# Altium PCB PCB1.PcbDoc
Units mm, origin at the board's own origin, x right, y up, seen from the top; angles counter-clockwise.
Board outline 32 x 16 mm, 2 copper layers (Top Layer, Bottom Layer), stack 0.48 mm thick; 46 components, 36 nets, 160 pads, 7 vias.
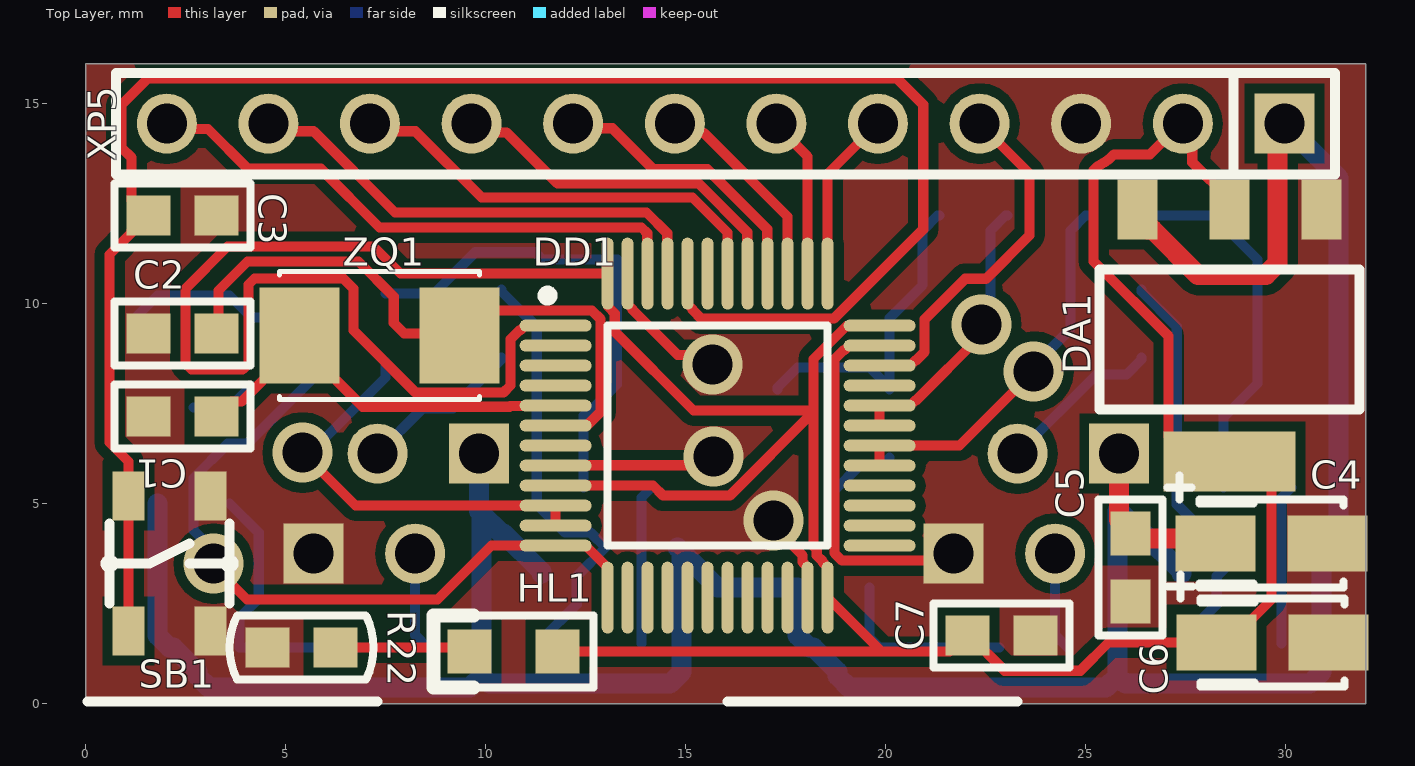
[diagram p0: Top Layer view]
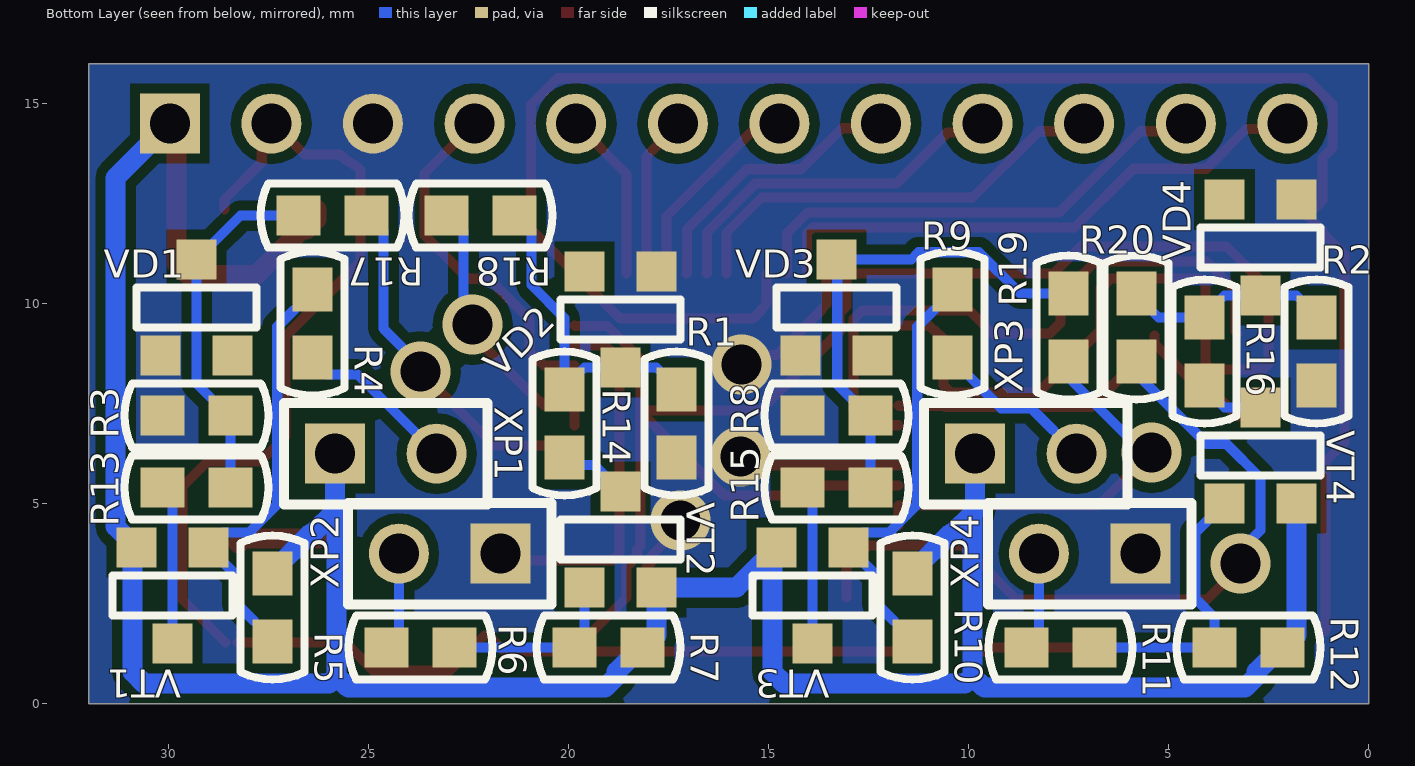
[diagram p1: Bottom Layer view, seen from below]
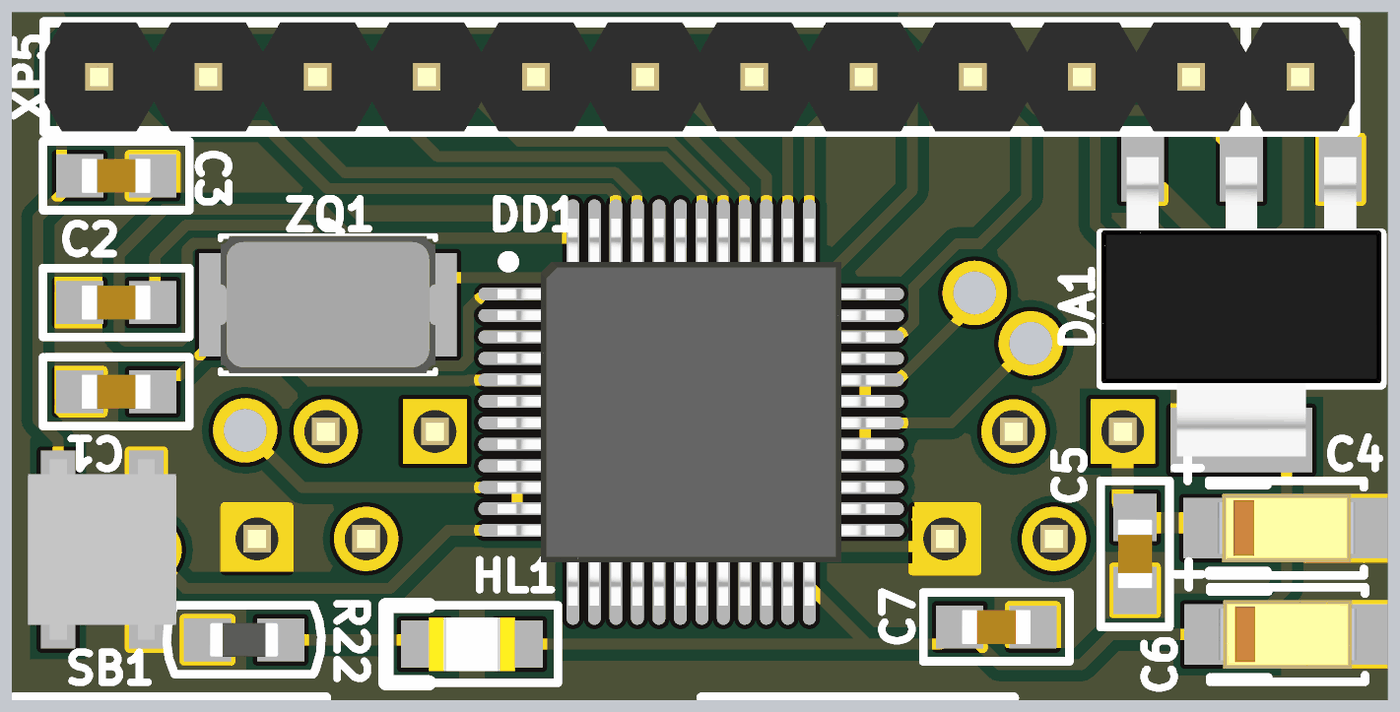
[diagram p2: 3D render of the assembled board from above, using the file's embedded part models]
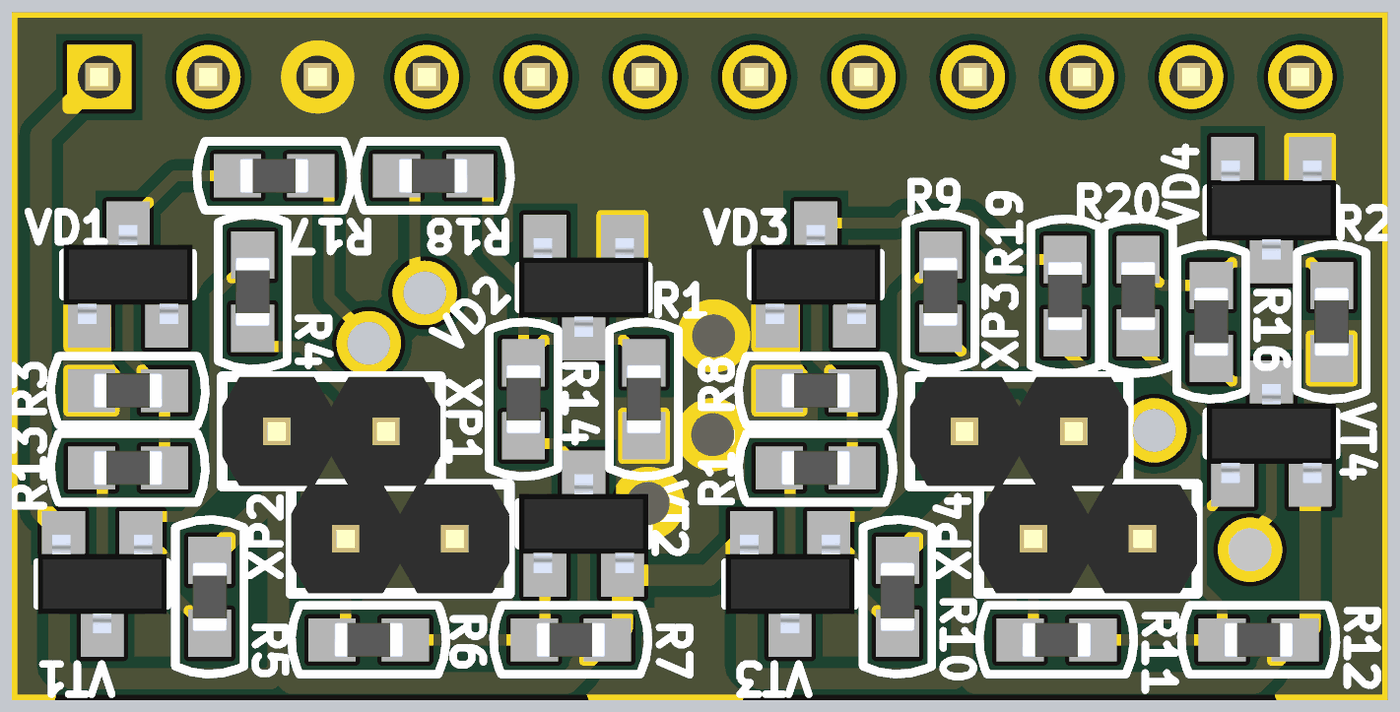
[diagram p3: 3D render of the assembled board from below, using the file's embedded part models]

## Layer stack, top to bottom
Top Solder: solder mask 0.0102, Solder Resist, Dk 3.5
Top Layer: signal copper 0.0356
Dielectric 1: dielectric 0.4086, FR-4, Dk 4.8
Bottom Layer: signal copper 0.0356
Bottom Solder: solder mask 0.0102, Solder Resist, Dk 3.5

## Board outline
0,0 32,0 32,16 0,16

## Design rules (kind name [scope] priority, off if disabled: settings)
Clearance [All] p1: gap=0.254 ignorepadtopadclearanceinfootprint=FALSE except(0: Arc-Hole Track-Hole SMDPad-Hole THPad-Hole Via-Hole Fill-Hole Poly-Hole Region-Hole Text-Hole; 0.1: Arc-Arc Arc-Track Arc-SMDPad Arc-Via Track-Track Track-SMDPad Track-Via SMDPad-SMDPad)
PolygonConnect [All] p1: connectstyle=Direct reliefconductorwidth=0.254 reliefentries=4 polygonreliefangle="90 Angle" airgapwidth=0.254
RoutingVias [All] p1: holewidth=0.711 width=1.27 viastyle="Through Hole" minholewidth=0.711 minwidth=1.27 maxholewidth=0.711 maxwidth=1.27
SolderMaskExpansion [All] p1: expansion=0.102 istentingtop=FALSE
UnRoutedNet [All] p1: checkbadconnections=TRUE
Width [All] p1: maxlimit=0.5 minlimit=0.1 preferedwidth=0.254
29 further rules are at their usual default settings.

## Components (designator, comment, footprint, x,y, rotation, side; value= is the part's Value field where it differs from the comment)
C1 "Capacitor" C0603 2.425,7.175 r0 top value=30pF
C2 "Capacitor" C0603 2.425,9.25 r0 top value=30pF
C3 "Capacitor" C0603 2.425,12.2 r0 top value=0.1uF
C4 "Capacitor-T" C3216-p 29.65,4 r0 top value=10uF
C5 "Capacitor" C0603 26.125,3.4 r270 top value=0.1uF
C6 "Capacitor-T" C3216-p 29.675,1.525 r0 top value=10uF
C7 "Capacitor" C0603 22.9,1.7 r0 top value=0.1uF
DA1 "LM1117-Series" SOT-223 28.6,9.1 r180 top value=LM1117MPX-ADJ
DD1 "STM32F103Cxxx-Series" LQFP-48 15.8,6.7 r0 top locked value=STM32F103C8T6
HL1 "Text" LD0805 10.7,1.3 r180 top value=KP-2012SGC
R1 "Resistor" R0603 17.3,7 r90 bottom value=10k
R2 "Resistor" R0603 1.3,8.8 r90 bottom value=10k
R3 "Resistor" R0603 29.3,7.2 r180 bottom value=10k
R4 "Resistor" R0603 26.4,9.5 r90 bottom value=10k
R5 "Resistor" R0603 27.4,2.4 r270 bottom value=100k
R6 "Resistor" R0603 23.7,1.4 r180 bottom value=10k
R7 "Resistor" R0603 19,1.4 r0 bottom value=10k
R8 "Resistor" R0603 13.3,7.2 r180 bottom value=10k
R9 "Resistor" R0603 10.4,9.5 r90 bottom value=10k
R10 "Resistor" R0603 11.4,2.4 r270 bottom value=100k
R11 "Resistor" R0603 7.7,1.4 r180 bottom value=10k
R12 "Resistor" R0603 3,1.4 r0 bottom value=10k
R13 "Resistor" R0603 29.3,5.4 r0 bottom value=1k
R14 "Resistor" R0603 20.1,7 r90 bottom value=1k
R15 "Resistor" R0603 13.3,5.4 r0 bottom value=1k
R16 "Resistor" R0603 4.1,8.8 r90 bottom value=1k
R17 "Resistor" R0603 25.9,12.2 r0 bottom value=1k
R18 "Resistor" R0603 22.2,12.2 r180 bottom value=1k
R19 "Resistor" R0603 7.5,9.4 r90 bottom value=1k
R20 "Resistor" R0603 5.8,9.4 r90 bottom value=1k
R22 "Resistor" R0603 5.4,1.4 r0 top value=200k
SB1 "Text" L-KLS7-TS3303A-1.5-250-B 2.1,3.5 r0 top
VD1 "Zener" SOT-23 29.3,9.9 r180 bottom value=BZX84-C3V3
VD2 "Zener" SOT-23 18.7,9.6 r0 bottom value=BZX84-C3V3
VD3 "Zener" SOT-23 13.3,9.9 r180 bottom value=BZX84-C3V3
VD4 "Zener" SOT-23 2.7,11.4 r0 bottom value=BZX84-C3V3
VT1 "BJT-PNP" SOT-23 29.9,2.7 r0 bottom value=BC857
VT2 "BJT-PNP" SOT-23 18.7,4.1 r180 bottom value=BC857
VT3 "BJT-PNP" SOT-23 13.9,2.7 r0 bottom value=BC857
VT4 "BJT-PNP" SOT-23 2.7,6.2 r180 bottom value=BC857
XP1 "in11" PLS-2 24.57,6.25 r180 bottom locked value=PLS-2
XP2 "in12" PLS-2 22.97,3.75 r0 bottom locked value=PLS-2
XP3 "in11" PLS-2 8.57,6.25 r180 bottom locked value=PLS-2
XP4 "in12" PLS-2 6.97,3.75 r0 bottom locked value=PLS-2
XP5 "Text" PLS-12 16,14.5 r180 top locked value=PLS-12
ZQ1 "NX5032GA-8.000M-STD-CSU-1" XTAL_NX5032GA-8.000M-STD-CSU-1 7.35,9.2 r180 top

## Footprints (in the part's own frame and the unit in brackets; to place one, negate y for a bottom-side part, rotate by r counter-clockwise, add the part's x,y. Pads: shape width x height; smd on the part's side, far side on the other; paste and mask are expansions set on the pad)
C0603 [mm] "1608M"
  rect 1.1x1 smd: 1(-0.85,0) 2(0.85,0)
  silkscreen extent -1.7,-0.8 1.7,0.8, body extent -0.8,-0.4 0.8,0.4, height 0.91
C3216-p [mm] "Type A"
  rect 2x1.4 smd: 1(-1.4,0) 2(1.4,0)
  silkscreen extent -2.6,-1.1 1.8,1.7, body extent -1.6,-0.8 1.6,0.8, height 1.8
L-KLS7-TS3303A-1.5-250-B [mm]
  rect 0.8x1.225 smd: 1(-1.025,-1.687) 1(-1.025,1.687) 2(1.025,-1.687) 2(1.025,1.687)
  silkscreen extent -1.6,-1 1.6,1, body extent -1.73,-2.1 1.72,2.1, height 1.5
LD0805 [mm]
  rect 1.1x1.1 smd: 1(-1.1,0) 2(1.1,0)
  silkscreen extent -2,-0.9 2,0.9, body extent -1,-0.62 1,0.63, height 0.73
LQFP-48 [mm] "Thin QFP, 48-Leads, Body 7x7mm, Pitch 0.5mm, IPC Medium Density"
  oval 1.8x0.3 smd: 1(-4.05,2.75) 2(-4.05,2.25) 3(-4.05,1.75) 4(-4.05,1.25) 5(-4.05,0.75) 6(-4.05,0.25) 7(-4.05,-0.25) 8(-4.05,-0.75) 9(-4.05,-1.25) 10(-4.05,-1.75) 11(-4.05,-2.25) 12(-4.05,-2.75) 25(4.05,-2.75) 26(4.05,-2.25) 27(4.05,-1.75) 28(4.05,-1.25) 29(4.05,-0.75) 30(4.05,-0.25) 31(4.05,0.25) 32(4.05,0.75) 33(4.05,1.25) 34(4.05,1.75) 35(4.05,2.25) 36(4.05,2.75)
  oval 0.3x1.8 smd: 13(-2.75,-4.05) 14(-2.25,-4.05) 15(-1.75,-4.05) 16(-1.25,-4.05) 17(-0.75,-4.05) 18(-0.25,-4.05) 19(0.25,-4.05) 20(0.75,-4.05) 21(1.25,-4.05) 22(1.75,-4.05) 23(2.25,-4.05) 24(2.75,-4.05) 37(2.75,4.05) 38(2.25,4.05) 39(1.75,4.05) 40(1.25,4.05) 41(0.75,4.05) 42(0.25,4.05) 43(-0.25,4.05) 44(-0.75,4.05) 45(-1.25,4.05) 46(-1.75,4.05) 47(-2.25,4.05) 48(-2.75,4.05)
  silkscreen extent -4.37,-2.75 2.75,3.62, body extent -4.5,-4.5 4.5,4.5, height 1.5
PLS-2 [mm]
  rect 1.5x1.5 hole 1: 1(-1.27,0)
  round 1.5 hole 1: 2(1.27,0)
  silkscreen extent -2.54,-1.27 2.54,1.27, body extent -2.54,-1.27 2.54,1.27, height 8.9
PLS-12 [mm]
  rect 1.5x1.5 hole 1: 1(-13.97,0)
  round 1.5 hole 1: 2(-11.43,0) 3(-8.89,0) 4(-6.35,0) 5(-3.81,0) 6(-1.27,0) 7(1.27,0) 8(3.81,0) 9(6.35,0) 10(8.89,0) 11(11.43,0) 12(13.97,0)
  silkscreen extent -15.24,-1.27 15.24,1.27, body extent -15.24,-1.27 15.24,1.27, height 8.9
R0603 [mm] "1608M"
  rect 1.1x1 smd: 1(-0.85,0) 2(0.85,0)
  silkscreen extent -1.8,-0.8 1.8,0.8, body extent -0.8,-0.4 0.8,0.4, height 0.38
SOT-23 [mm] "КТ-46"
  rect 1x1 smd: 1(-0.9,-1.2) 2(0,1.2) 3(0.9,-1.2)
  silkscreen extent -1.5,-0.5 1.5,0.5, body extent -1.5,-1.15 1.5,1.15, height 1.11
SOT-223 [mm]
  rect 1x1.5 smd: 1(-2.3,-3.25) 2(0,-3.25) 3(2.3,-3.25)
  rect 3.3x1.5 smd: 2(0,3.05)
  silkscreen extent -3.25,-1.75 3.25,1.75, body extent -3.25,-3.53 3.25,3.43, height 1.65
XTAL_NX5032GA-8.000M-STD-CSU-1 [mm]
  rect 2x2.4 smd: 1(-2,0) 2(2,0)
  silkscreen extent -2.5,-1.6 2.5,1.6, body extent -2.5,-1.6 2.5,1.6, height 1.5

## Part data
C1 C2: library part GRM1885C1H300FA01D, "30pF 0603", Dielectric Type=NP0, Manufacturer=Murata, Tolerance=±1%, Voltage=50V, Application Category=1, ID=168, Part Number=GRM1885C1H300FA01D, Published=18.05.2010, Publisher="Andrew Danich", Type=Конденсатор
C3: library part GRM188R71C104KA01D, Dielectric Type=X7R, Manufacturer=Murata, Tolerance=±10%, Voltage=16V, Working Temperature Max=+125°С, Working Temperature Min=-55°С, Application Category=1, ID=131, Part Number=GRM188R71C104KA01D, Published=18.05.2010, Publisher="Andrew Danich", Type=Конденсатор
C4 C6: library part T491A106K006AT, "10 uF", Leakage Current=600nA, Manufacturer=Kemet, Tolerance=±10%, Voltage=6.3V, Working Temperature Max=+125°С, Working Temperature Min=-55°С, Application Category=1, ESR=4ohm, ID=25, Part Number=T491A106K006AT, Published=23.04.2010, Publisher="Andrew Danich", Type=Конденсатор
C5 C7: library part GRM188R71C104KA01D, "0.1 uF", Dielectric Type=X7R, Manufacturer=Murata, Tolerance=±10%, Voltage=16V, Working Temperature Max=+125°С, Working Temperature Min=-55°С, Application Category=1, ID=131, Part Number=GRM188R71C104KA01D, Published=18.05.2010, Publisher="Andrew Danich", Type=Конденсатор
DA1: library part LM1117MPX-ADJ, Input Voltage=+8.5…20V, Output Current=800mA, Output Voltage=+ADJ, ID=5, Part Number=LM1117MPX-ADJ, Published=13.08.2015, Publisher="Andrew Danich", Type=Микросхема
DD1: library part STM32F103C8T6, Manufacturer=STMicroelectronics, Operation Frequency=72MHz, Working Temperature Max=+85°С, Working Temperature Min=-40°С, Application Category=1, EEPROM=-, Flash=64K, I/O Lines=37, ID=20, Part Number=STM32F103C8T6, Prog Interface="JTAG, SWD, UART", Published=16.10.2015, Publisher="Andrew Danich", SRAM=20K, Supply Operation=+2.0…3.6V, Type=Микросхема
HL1: library part KP-2012SGC, Color=Green, Forward Current=25mA, Forward Voltage=2.5V, Manufacturer=Kingbright, Power Dissipation=62.5mW, Working Temperature Max=+85°С, Working Temperature Min=-40°С, Application Category=1, ID=21, Leds=1, Part Number=KP-2012SGC, Published=03.12.2013, Publisher="Andrew Danich", Type="Индикатор единичный"
R1 R2 R3 R4 R6 R7 R8 R9 R11 R12: library part RC0603JR-0710KL, "10K", Limit Voltage=50V, Manufacturer=Yageo, Temperature Coefficient=100ppm, Tolerance=±5%, Total Power Dissipation=0.1W, Working Temperature Max=+155°С, Working Temperature Min=-55°С, Application Category=1, Functional Analog=CR0603-JW-103E, ID=12, Part Number=RC0603JR-0710KL, Published=24.03.2010, Publisher="Andrew Danich", Series Type=Thick-Film, Type=Резистор
R5 R10: library part RC0603JR-07100KL, "100k", Limit Voltage=50V, Manufacturer=Yageo, Temperature Coefficient=100ppm, Tolerance=±5%, Total Power Dissipation=0.1W, Working Temperature Max=+155°С, Working Temperature Min=-55°С, Application Category=1, Functional Analog=CR0603-JW-104E, ID=11, Part Number=RC0603JR-07100KL, Published=24.03.2010, Publisher="Andrew Danich", Series Type=Thick-Film, Type=Резистор
R13 R14 R15 R16 R17 R18 R19 R20: library part RC0603JR-071KL, "1k", Limit Voltage=50V, Manufacturer=Yageo, Temperature Coefficient=100ppm, Tolerance=±5%, Total Power Dissipation=0.1W, Working Temperature Max=+155°С, Working Temperature Min=-55°С, Application Category=1, Functional Analog=CR0603-JW-102E, ID=19, Part Number=RC0603JR-071KL, Published=24.03.2010, Publisher="Andrew Danich", Series Type=Thick-Film, Type=Резистор
R22: library part RC0603FR-07200KL, "68 Om", Limit Voltage=50V, Manufacturer=Yageo, Temperature Coefficient=100ppm, Tolerance=±1%, Total Power Dissipation=0.1W, Working Temperature Max=+155°С, Working Temperature Min=-55°С, Application Category=1, ID=348, Part Number=RC0603FR-07200KL, Published=24.03.2010, Publisher="Andrew Danich", Series Type=Thick-Film, Type=Резистор
SB1: library part L-KLS7-TS3303A-1.5-250-B, ID=31, Part Number=L-KLS7-TS3303A-1.5-250-B, Published=17.04.2014, Publisher="Andrew Danich", Type=Переключатель
VD1 VD2 VD3 VD4: library part BZX84-C3V3, Capacitance=450pF, Differential resistance=95ohm, Forward Current=200mA, Forward Voltage=0.9V, Manufacturer=NXP, Reverse Current=5uA, Total Power Dissipation=250mW, Working Temperature Max=+150°С, Working Temperature Min=-65°С, Working Voltage=3.3V, Application Category=1, ID=10, Part Number=BZX84-C3V3, Published=20.05.2013, Publisher="Andrew Danich", Type=Стабилитрон
VT1 VT2 VT3 VT4: library part BC857, C-E Saturation Voltage=0.6V, C-E Voltage=45V, Collector Current=100mA, DC Current Gain=125…800, Total Power Dissipation=250mW, Transition Frequency=100MHz, ID=2, Part Number=BC857, Published=07.05.2013, Publisher="Andrew Danich", Type=Транзистор
XP1 XP2 XP3 XP4: library part PLS-2, Limit Current=3A, Limit Voltage=250V, Resistance=15momh, Connector Type=Male, ID=1, Part Number=PLS-2, Pins=2, Pitch=2.54mm, Published=07.03.2013, Publisher="Andrew Danich", Surface Finish=Gold, Type=Вилка
XP5: library part PLS-12, Limit Current=3A, Limit Voltage=250V, Resistance=15momh, Connector Type=Male, ID=10, Part Number=PLS-12, Pins=12, Pitch=2.54mm, Published=07.03.2013, Publisher="Andrew Danich", Surface Finish=Gold, Type=Вилка
ZQ1: "8 MHz ±50ppm Crystal 8pF 300 Ohms 2-SMD, No Lead", Package="SMD-2 NDK America, Inc.", Check_prices=https://www.snapeda.com/parts/NX5032GA-8.000M-STD-CSU-1/NDK+America%252C+Inc./view-part/?ref=eda, MF="NDK America,", MP=NX5032GA-8.000M-STD-CSU-1, SnapEDA_Link=https://www.snapeda.com/parts/NX5032GA-8.000M-STD-CSU-1/NDK+America%252C+Inc./view-part/?ref=snap

## Via types
v1: diameter 1.5, hole 1, Top Layer to Bottom Layer, 7 vias

## Nets (pads, with @x,y where several pads share a name; then routed paths per layer and width w, separated by ;. In a path a pad name is that pad's centre, name@x,y a point inside that pad or via, vN(x,y) a via of type N, cw(c..) or ccw(c..) an arc to the next point about the centre after c; other vN are vias at no path point)
+7.4: C4.1 C5.1 DA1.3 R5.1 R7.1 R10.1 R12.1 VT1.3 VT2.3 VT3.3 VT4.3 XP1.1 XP3.1 XP5.1 | length 81.4
  Top Layer w0.5: XP1.1 25.84,4.585 26.125,4.3 C5.1 26.25,4.125 28.125,4.125 C4.1 ; DA1.3 26.3,12.1 26.55,11.85 26.672,11.85 27.808,10.714 29.507,10.714 29.8,11.007 29.8,14.33 XP5.1
  Bottom Layer w0.5: VT4.3 1.8,1.7 2.1,1.4 R12.1 2.2,1.4 2.796,0.804 2.796,0.691 3.091,0.396 9.607,0.396 9.9,0.689 ; XP3.1 9.84,4.81 9.9,4.75 ; R10.1 11.4,3.3 10.443,4.257 10.393,4.257 9.9,4.75 ; VT3.3 VT3.3@14.904,3.796 ; 25.8,4.81 25.8,0.689 ; XP1.1 25.84,4.81 26.393,4.257 26.443,4.257 27.4,3.3 R5.1 ; XP5.1 31.325,13.145 31.325,4.425 VT1.3 30.904,3.796 30.904,0.791 30.609,0.496 25.993,0.496 25.8,0.689 ; 9.9,0.689 10.093,0.496 14.609,0.496 14.904,0.791 VT3.3@14.904,3.796 ; 9.9,0.689 9.9,4.75 ; VT3.3@14.904,3.796 15.8,2.9 VT2.3 17.8,1.7 18.1,1.4 R7.1 18.2,1.4 18.796,0.804 18.796,0.691 19.091,0.396 25.507,0.396 25.8,0.689
GND: C1.1 C2.1 C3.2 C4.2 C5.2 C6.2 C7.2 DA1.1 DD1.8 DD1.23 DD1.35 DD1.47 R1.1 R2.1 R3.1 R8.1 R22.1 SB1.2 VD1.1 VD2.1 VD3.1 VD4.1 XP2.1 XP4.1 XP5.3 | length 19.6
  Top Layer w0.254: DD1.8 11.759,5.959 15.484,5.959 v1(15.7,6.175) ; DD1.47 13.55,9.988 13.673,9.865 13.673,9.844 14.803,8.713 15.437,8.713 v1(15.675,8.475) ; v1@15.509,5.959 v1@15.7,6.15 ; v1@17.125,4.739 17.125,4.505 17.927,3.703 17.927,3.535 18.05,3.412 DD1.23 ; DD1.35 19.088,8.95 18.965,8.827 18.944,8.827 18.723,8.606 18.723,3.76 18.91,3.573 21.523,3.573 XP2.1
  other v1: 17.2,4.575
NetC1_2: C1.2 DD1.5 ZQ1.2 | length 10.1
  Top Layer w0.254: C1.2 3.648,7.548 3.898,7.548 4.477,8.127 ZQ1.2@5.35,9 ; ZQ1.2 ZQ1.2@5.35,9 ; DD1.5 11.741,7.441 10.613,7.441 10.591,7.419 6.931,7.419 ZQ1.2@5.35,9
NetC2_2: C2.2 DD1.6 ZQ1.1 | length 16
  Top Layer w0.254: C2.2 3.325,9.3 3.325,10.325 4.05,11.05 6.825,11.05 7.704,10.171 7.704,9.515 7.969,9.25 9.3,9.25 ZQ1.1 9.977,9.827 12.656,9.827 12.877,9.606 12.877,7.294 12.542,6.959 11.759,6.959 DD1.6
NetC3_1: C3.1 DD1.44 SB1.1 | length 45.5
  Top Layer w0.254: SB1.1@1.075,1.813 1.075,5.188 1.075,6.05 0.6,6.525 0.6,11.225 1.152,11.777 1.152,11.827 C3.1@1.525,12.2 ; C3.1 C3.1@1.525,12.2 ; DD1.44 15.05,9.988 15.173,9.865 15.173,9.844 15.394,9.623 18.125,9.623 18.706,9.623 20.941,11.858 20.941,14.968 20.278,15.631 1.562,15.631 0.899,14.968 0.899,13.897 1.152,13.644 1.152,12.573 C3.1@1.525,12.2
NetDD1_10: DD1.10 DD1.11 R19.1 | length 10.6
  Top Layer w0.254: v1(5.425,6.275) 6.75,4.95 DD1.10 DD1.11
  Bottom Layer w0.254: v1(5.425,6.275) 5.625,6.275 7.5,8.15 R19.1
NetDD1_12: DD1.12 DD1.13 R20.1 | length 18.6
  Top Layer w0.254: v1(3.2,3.496) 3.2,3.437 4.037,2.6 8.8,2.6 10.15,3.95 DD1.12 12.5,3.95 13.05,3.4 DD1.13
  Bottom Layer w0.254: v1(3.2,3.496) 3.2,3.833 2.7,4.333 2.7,5.639 3.555,6.493 4.044,6.493 5.8,8.249 R20.1
NetDD1_29: DD1.29 DD1.30 R17.1 | length 9.6
  Top Layer w0.254: DD1.29 DD1.30 21.85,6.45 v1(23.7,8.3)
  Bottom Layer w0.254: v1(23.7,8.3) 23.7,8.445 24.627,9.372 24.627,11.827 25,12.2 R17.1
NetDD1_31: DD1.31 DD1.32 R18.1 | length 7.1
  Top Layer w0.254: DD1.31 DD1.32 20.612,7.45 20.735,7.573 20.756,7.573 22.396,9.213 v1(22.396,9.473)
  Bottom Layer w0.254: v1(22.396,9.473) 22.627,9.704 22.627,11.827 23,12.2 R18.1
NetDD1_34: DD1.34 XP5.4 | length 8.9
  Top Layer w0.254: DD1.34 20.612,8.45 20.735,8.573 20.756,8.573 20.977,8.794 20.977,9.606 21.989,10.619 22.515,10.619 23.6,11.704 23.6,13.25 XP5.4
NetDD1_37: DD1.37 XP5.5 | length 4.3
  Top Layer w0.254: DD1.37 18.55,13.24 XP5.5
NetDD1_38: DD1.38 XP5.6 | length 4.1
  Top Layer w0.254: XP5.6 17.27,14.461 18.05,13.681 DD1.38
NetDD1_39: DD1.39 XP5.7 | length 5.2
  Top Layer w0.254: XP5.7 14.968,14.262 15.463,14.262 17.55,12.175 DD1.39
NetDD1_40: DD1.40 XP5.8 | length 7.1
  Top Layer w0.254: XP5.8 12.306,14.384 13.166,14.384 14.192,13.358 15.542,13.358 17.041,11.859 17.041,10.759 DD1.40
NetDD1_41: DD1.41 XP5.9 | length 9.1
  Top Layer w0.254: XP5.9 9.871,14.279 10.521,14.279 11.796,13.004 15.322,13.004 16.541,11.784 16.541,10.759 DD1.41
NetDD1_42: DD1.42 XP5.10 | length 11.1
  Top Layer w0.254: XP5.10 7.3,14.31 8.241,14.31 9.901,12.65 15.175,12.65 16.05,11.775 DD1.42
NetDD1_45: DD1.45 XP5.11 | length 12.1
  Top Layer w0.254: XP5.11 4.76,14.31 5.701,14.31 7.736,12.275 14.024,12.275 14.541,11.758 DD1.45@14.541,10.759
NetDD1_46: DD1.46 XP5.12 | length 14.1
  Top Layer w0.254: XP5.12 2.167,14.363 3.062,14.363 4.056,13.369 5.038,13.369 5.881,13.369 7.35,11.9 13.898,11.9 14.041,11.757 DD1.46@14.041,10.759
NetHL1_2: HL1.2 R22.2 | length 3.4
  Top Layer w0.254: R22.2 9.5,1.4 HL1.2
NetR1_2: R1.2 R14.2 R18.2 VD2.2 | length 8.2
  Bottom Layer w0.254: R1.2 17.3,7.9 17.8,8.4 VD2.2 19.6,8.4 R14.2@20.1,7.9 ; R14.2 R14.2@20.1,7.9 ; R18.2 21.3,12.2 20.927,11.827 20.927,10.464 20.1,9.637 R14.2@20.1,7.9
NetR2_2: R2.2 R16.2 R20.2 VD4.2 | length 5.3
  Bottom Layer w0.254: R2.2 1.3,9.7 1.8,10.2 VD4.2 3.6,10.2 4.1,9.7 R16.2 5.25,9.65 5.8,10.2 R20.2
NetR3_2: R3.2 R13.1 R17.2 VD1.2 | length 9.1
  Bottom Layer w0.254: R17.2 28.2,12.2 VD1.2 29.3,8 28.5,7.2 R3.2 R13.1
NetR4_1: R4.1 XP1.2 | length 4.1
  Bottom Layer w0.254: XP1.2 25.277,8.227 26.027,8.227 26.4,8.6 R4.1
NetR4_2: R4.2 R5.2 VT1.1 | length 10.9
  Bottom Layer w0.254: R4.2 26.4,10.3 27.281,9.419 27.281,4.98 27.988,4.273 28.627,4.273 VT1.1 28.281,3.181 28.281,2.481 27.4,1.6 R5.2
NetR6_1: R6.1 XP2.2 | length 2.5
  Bottom Layer w0.254: XP2.2 24.24,1.71 R6.1
NetR6_2: R6.2 R7.2 VT2.1 | length 4.6
  Bottom Layer w0.254: VT2.1 19.6,1.65 R7.2 R6.2
NetR8_2: R8.2 R15.1 R19.2 VD3.2 | length 12.4
  Bottom Layer w0.254: R19.2 8.711,10.25 9.742,11.281 11.244,11.281 11.425,11.1 VD3.2 13.281,11.081 13.281,7.981 12.5,7.2 R8.2 R15.1
NetR9_1: R9.1 XP3.2 | length 4.1
  Bottom Layer w0.254: XP3.2 8.431,7.381 9.181,7.381 10.4,8.6 R9.1
NetR9_2: R9.2 R10.2 VT3.1 | length 10.9
  Bottom Layer w0.254: R9.2 10.4,10.3 11.281,9.419 11.281,4.98 11.988,4.273 12.627,4.273 VT3.1 12.281,3.181 12.281,2.481 11.4,1.6 R10.2
NetR11_1: R11.1 XP4.2 | length 2.5
  Bottom Layer w0.254: XP4.2 8.24,1.71 R11.1
NetR11_2: R11.2 R12.2 VT4.1 | length 7.1
  Bottom Layer w0.254: VT4.1 4.331,4.269 4.331,2.632 3.85,2.151 R12.2 R11.2
NetR13_2: R13.2 VT1.2 | length 4
  Bottom Layer w0.254: VT1.2 29.9,5.15 R13.2
NetR14_1: R14.1 VT2.2 | length 1.8
  Bottom Layer w0.254: VT2.2 19.368,5.968 19.918,5.968 R14.1
NetR15_2: R15.2 VT3.2 | length 4
  Bottom Layer w0.254: VT3.2 13.9,5.15 R15.2
NetR16_1: R16.1 VT4.2 | length 1.7
  Bottom Layer w0.254: VT4.2 3.6,7.4 4.1,7.9 R16.1
VCC: C6.1 C7.1 DA1.2 DD1.1 DD1.9 DD1.24 DD1.36 DD1.48 HL1.1 XP5.2 | length 90
  Top Layer w0.254: DD1.9 14.187,5.45 14.439,5.198 16.105,5.198 18.2,7.293 ; DD1.1 10.988,9.45 10.865,9.327 10.844,9.327 10.623,9.106 10.623,7.952 10.444,7.773 8.256,7.773 6.7,9.329 6.7,10.371 6.444,10.627 4.224,10.627 4.075,10.478 4.075,8.499 3.926,8.35 2.647,8.35 2.498,8.499 2.498,10.373 3.55,11.425 7.2,11.425 7.875,10.75 DD1.48 13.059,10.741 13.059,9.925 13.231,9.753 13.231,9.294 15.2,7.325 18.2,7.325 ; HL1.1 19.9,1.3 ; DD1.36 19.841,9.441 19.025,9.441 18.2,8.616 18.2,7.325 ; C6.1 25.575,1.525 24.869,0.819 22.981,0.819 22.1,1.7 C7.1 22,1.7 21.6,1.3 19.9,1.3 ; C6.1@28.575,1.525 29.65,2.6 29.65,5.427 29.027,6.05 28.6,6.05 27.7,6.05 27.077,6.673 27.077,9.182 25.274,10.984 25.2,11.059 25.2,13.34 25.274,13.415 cw(c25.454,13.235) 25.275,13.416 25.459,13.523 ccw(c24.89,14.5) 25.716,13.728 26.603,13.728 27.375,14.5 XP5.2 27.668,14.262 27.668,13.532 28.6,12.6 DA1.2@28.6,12.35 ; 18.2,7.293 18.2,3.93 18.281,3.849 18.281,3.702 18.427,3.556 18.427,3.535 18.55,3.412 DD1.24 19.9,1.3 ; 18.2,7.293 18.2,7.325
pads on no net: DD1.2 DD1.3 DD1.4 DD1.7 DD1.14 DD1.15 DD1.16 DD1.17 DD1.18 DD1.19 DD1.20 DD1.21 DD1.22 DD1.25 DD1.26 DD1.27 DD1.28 DD1.33 DD1.43 VD1.3 VD2.3 VD3.3 VD4.3

## Polygon pours and split planes (outlines as drawn)
GND on Bottom Layer "GND_L02_P000" (solid, pour order 0): 0,16 32,16 32,0 0,0
GND on Top Layer "GND_L01_P006" (solid, pour order 6): 0,16 32,16 32,0 0,0

## Silkscreen, mask and mechanical layers (free items; w line width, h text height)
Top Overlay:
  lines w0.254: 5.7,0.05 0.05,0.05 ; 7.25,0.05 0.05,0.05 ; 7.3,0.05 0.05,0.05 ; 21.7,0.05 16.05,0.05 23.3,0.05
Bottom Solder:
  the board outline again, w0.254
Mechanical 1:
  lines w0.254: 5.7,0.05 5.7,3.75 ; 7.3,0.05 7.3,6.25 ; 21.7,0.05 21.7,3.75 ; 23.3,0.05 23.3,6.25 ; 0.05,0.05 0.05,15.95 15.95,15.95 15.95,0.05 0.05,0.05 ; 16.05,0.05 16.05,15.95 31.95,15.95 31.95,0.05 16.05,0.05